# Altium PCB Temp-RH_Sensor_Unit_board.PcbDoc
Units mm, origin at the board's own origin, x right, y up, seen from the top; angles counter-clockwise.
Board outline 60 x 60 mm, 4 copper layers (Component Side Top, Ground Plane, Power Plane, Component Side Bottom), stack 0.844 mm thick; 73 components, 53 nets, 315 pads, 117 vias.
Unrouted connection lines stored in the file: 6.
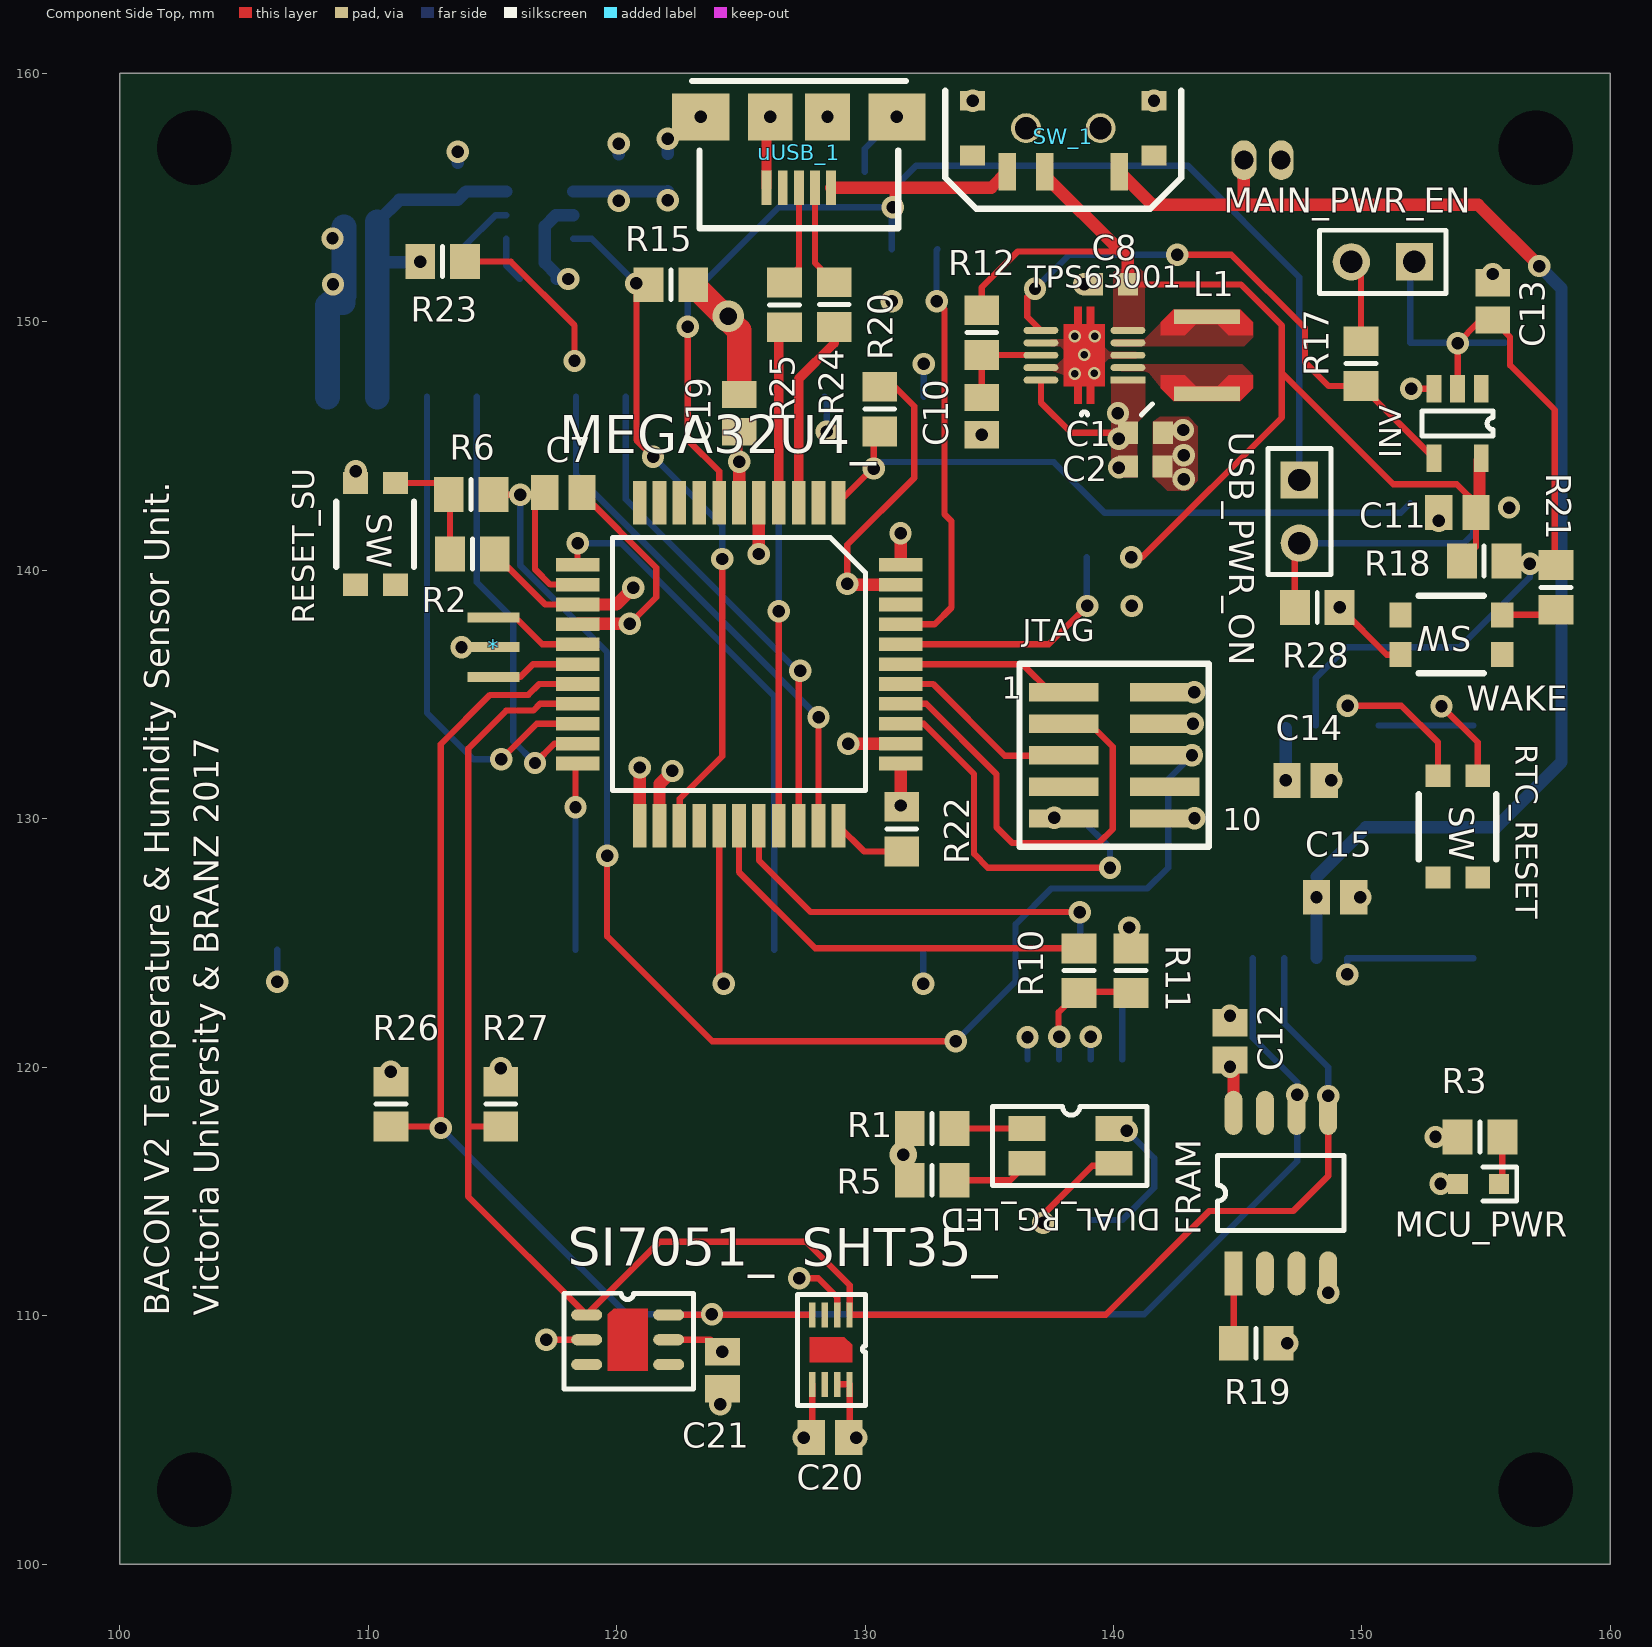
[diagram p0: Component Side Top view]
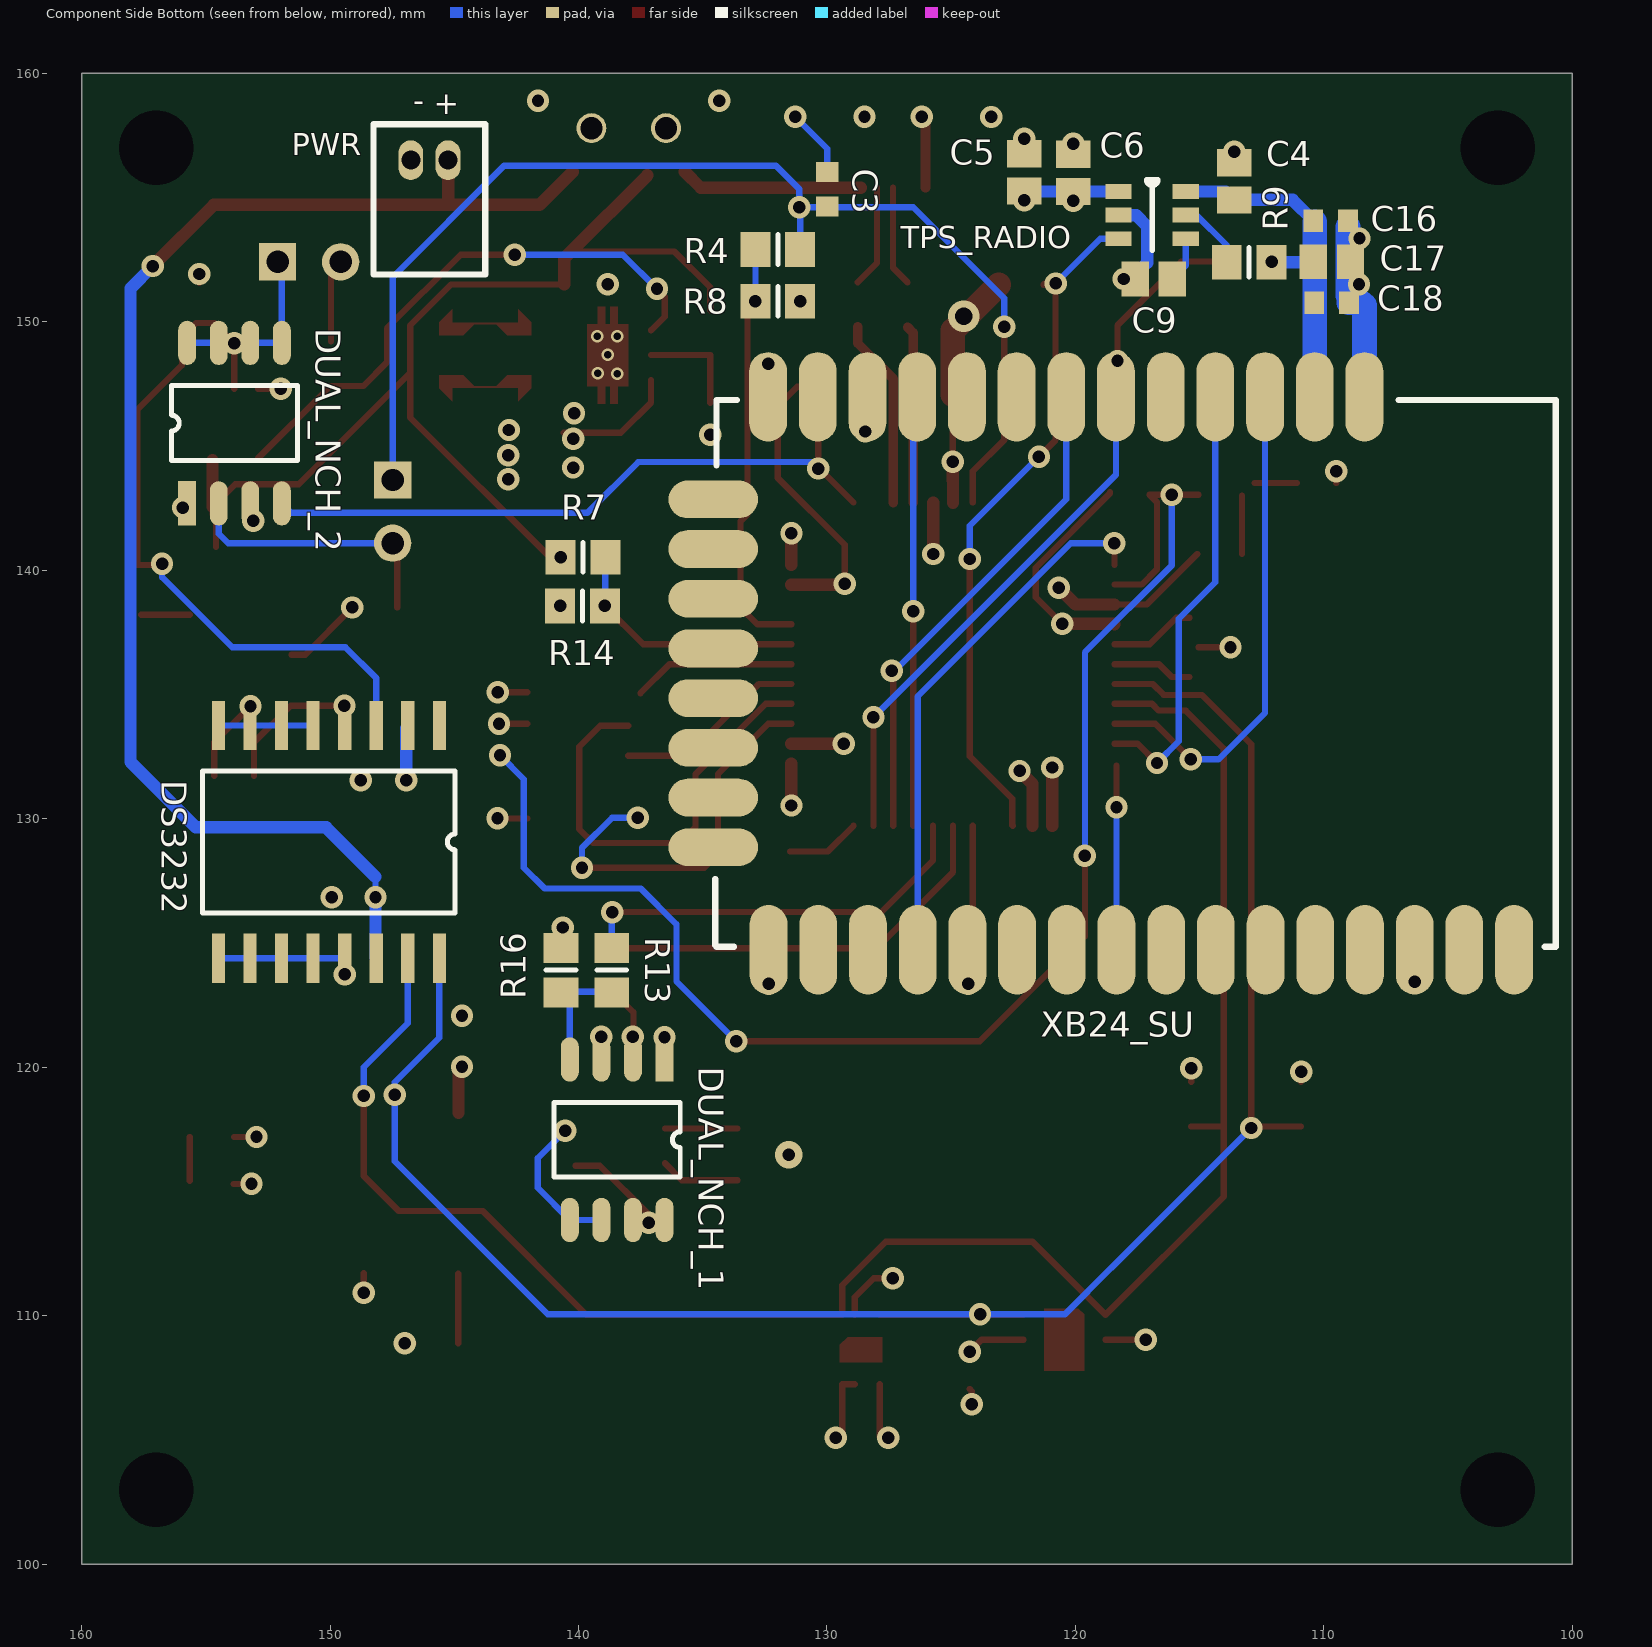
[diagram p1: Component Side Bottom view, seen from below]
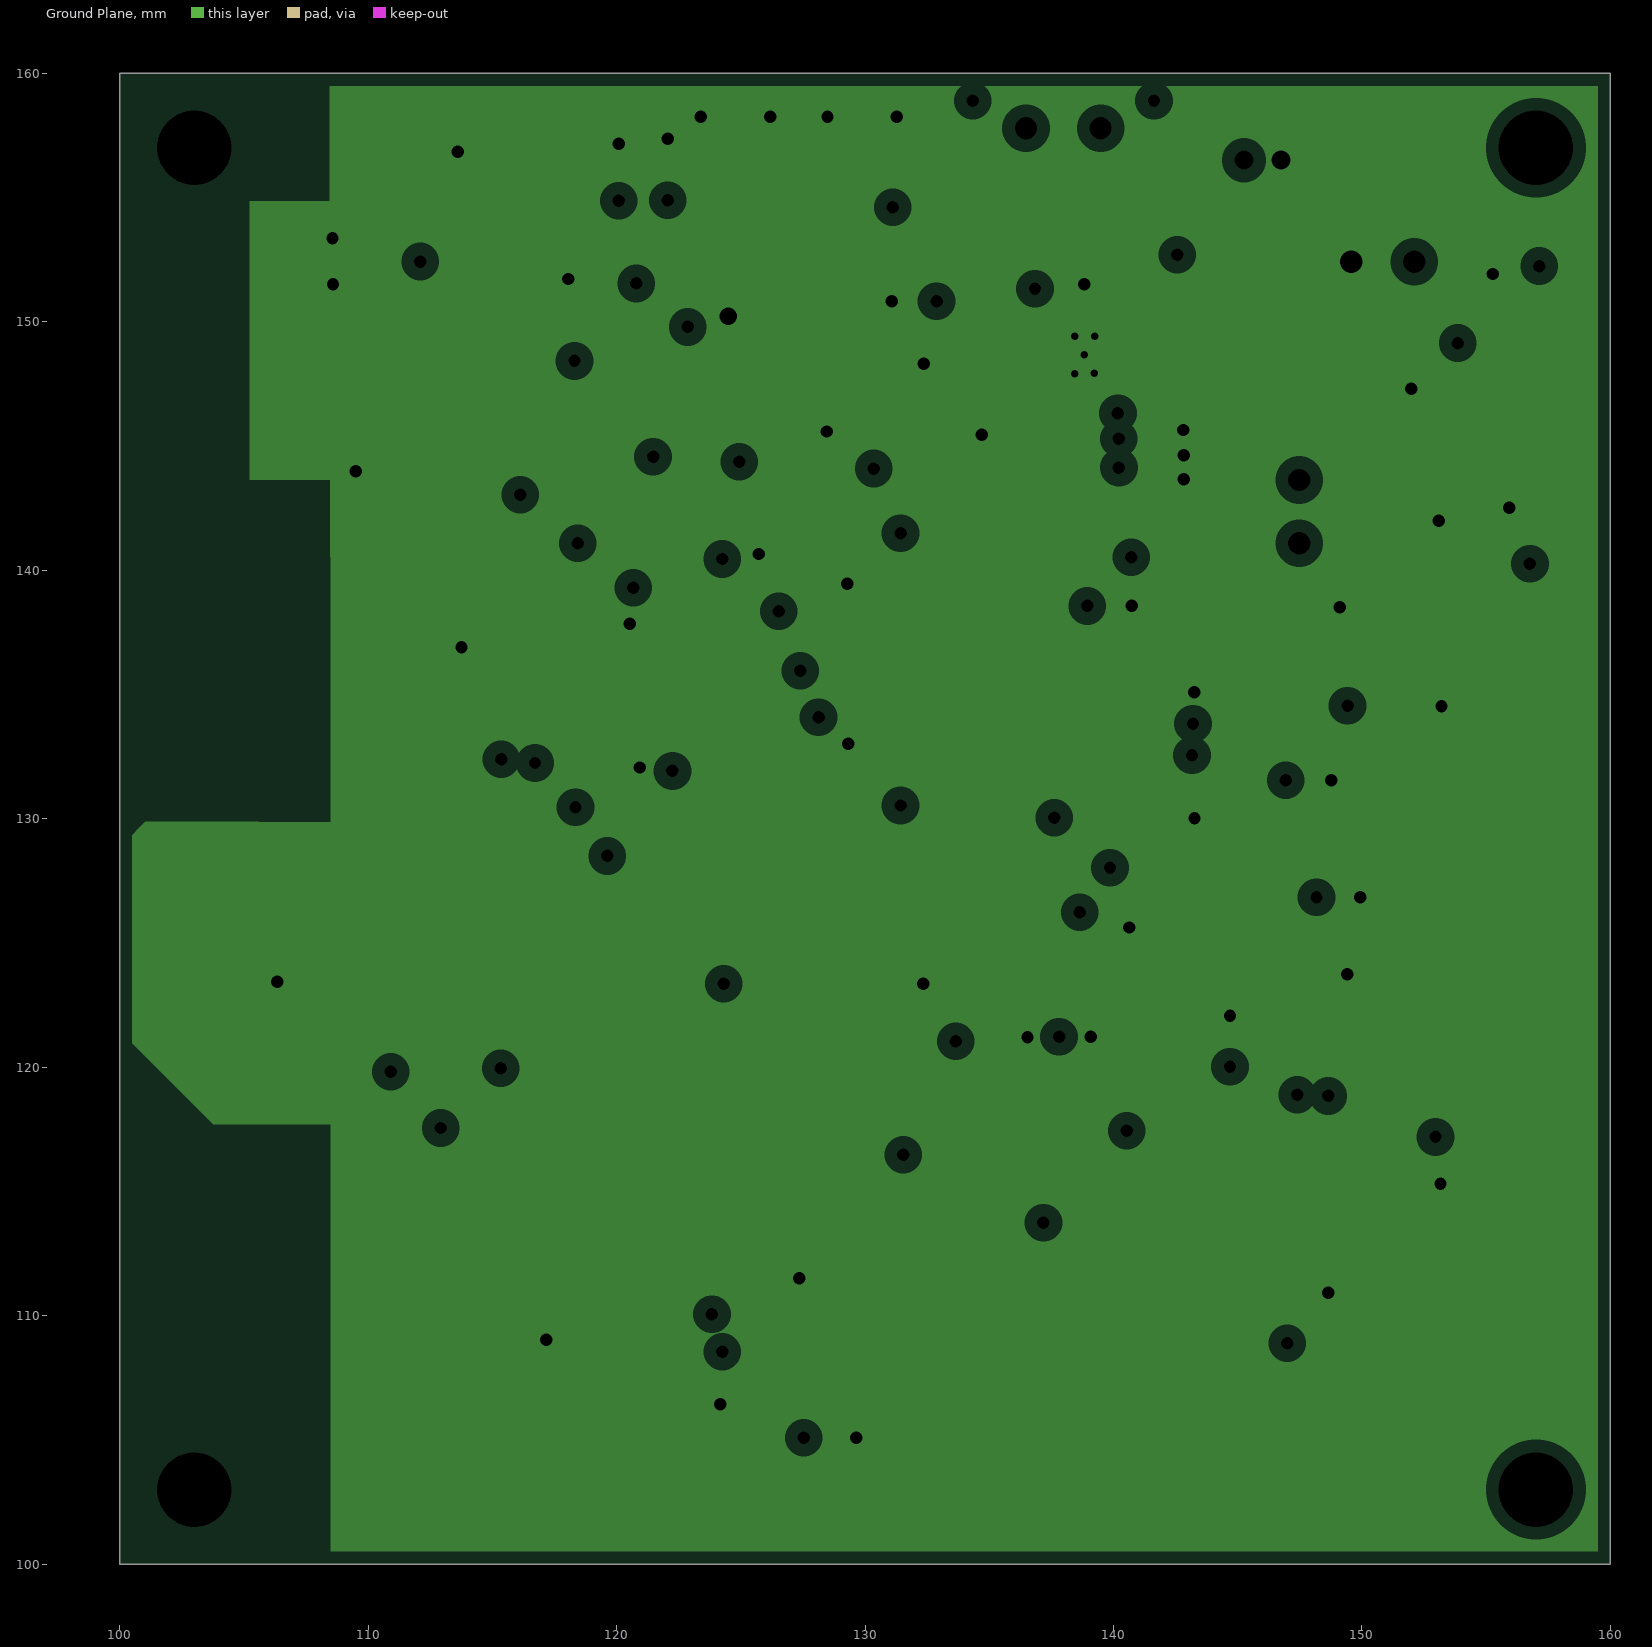
[diagram p2: Ground Plane, clearances drawn from the general rule]
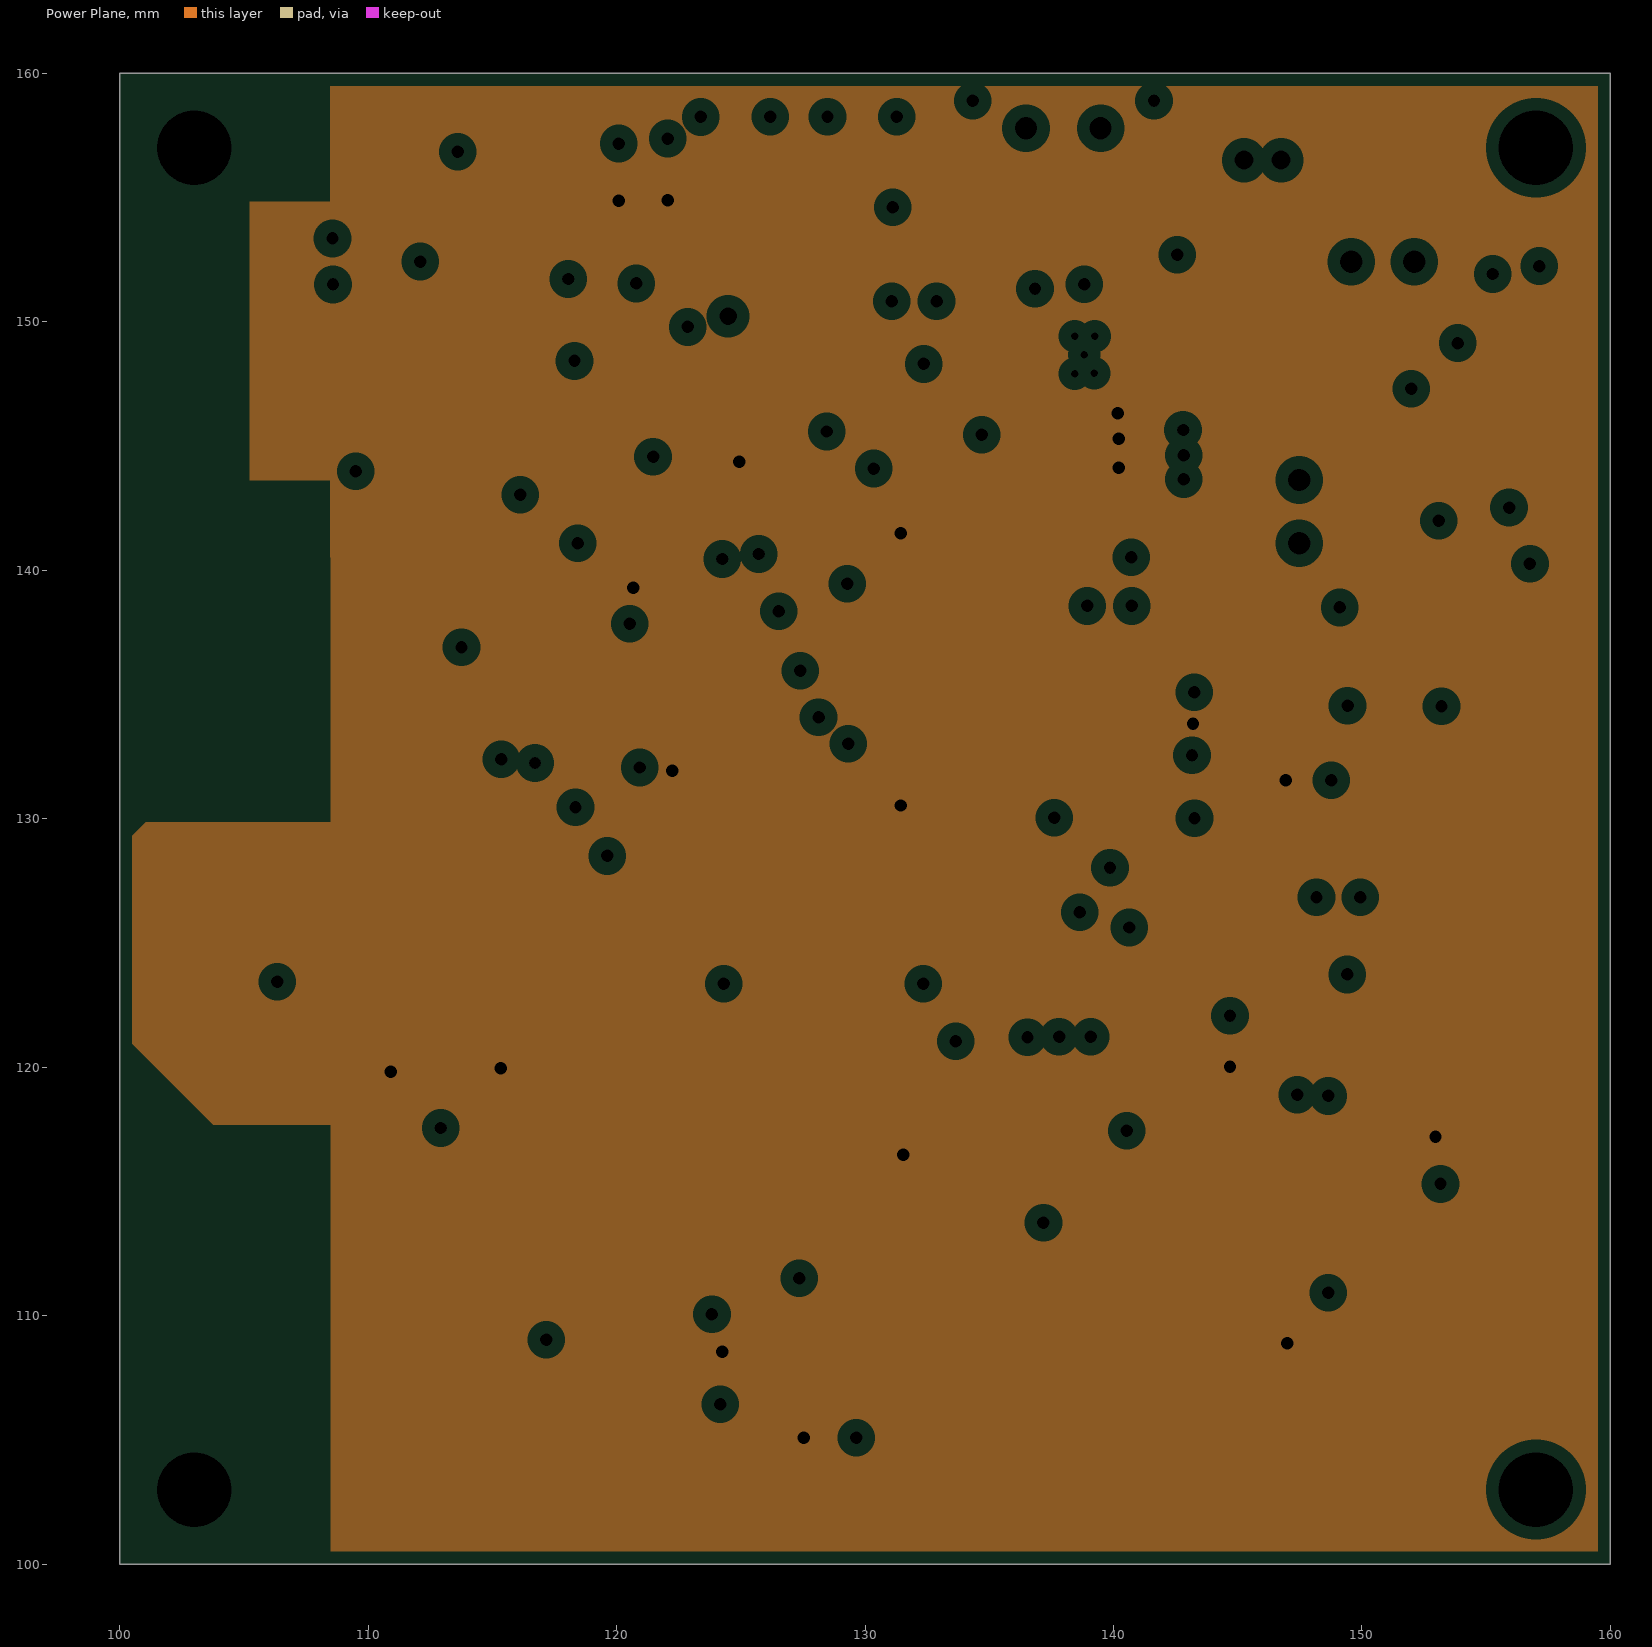
[diagram p3: Power Plane, clearances drawn from the general rule]

## Layer stack, top to bottom
Top Solder: solder mask 0.0102, Solder Resist, Dk 3.5
Component Side Top: signal copper 0.0356
Dielectric 1: core 0.32, FR-4, Dk 4.8
Ground Plane: plane copper 0.036, net GND
Dielectric 3: prepreg 0.127, Dk 4.2
Power Plane: plane copper 0.036, net +3V3_SU
Dielectric 4: core 0.254, Dk 4.2
Component Side Bottom: signal copper 0.0356
Bottom Solder: solder mask 0.0102, Solder Resist, Dk 3.5

## Board outline
100,100 160,100 160,160 100,160

## Design rules (kind name [scope] priority, off if disabled: settings)
Clearance [All] p1: gap=0.152
DiffPairsRouting [All] p1: maxlimit=0.254 minlimit=0.254 mostfreqgap=0.254 toplayer_minwidth=0.381 toplayer_maxwidth=0.381 toplayer_prefwidth=0.381 bottomlayer_minwidth=0.381 bottomlayer_maxwidth=0.381 bottomlayer_prefwidth=0.381 maxuncoupledlength=12.7
HoleSize [All] p1: absolutevalues=TRUE maxlimit=6.3 minlimit=0.3 maxpercent=80.000 minpercent=20.000
PlaneClearance [All] p1: clearance=0.508
PlaneConnect [All] p1: planeconnectstyle=Direct reliefexpansion=0.508 reliefentries=4 reliefconductorwidth=0.254 reliefairgap=0.254
PolygonConnect PolygonConnect_1 [All vs IsNamedPolygon('RegGND')] p1: connectstyle=Direct reliefconductorwidth=0.254 reliefentries=4 polygonreliefangle="90 Angle" airgapwidth=0.254
PolygonConnect [All] p2: connectstyle=Direct reliefconductorwidth=0.254 reliefentries=4 polygonreliefangle="90 Angle" airgapwidth=0.254
RoutingVias [All] p1: holewidth=0.5 width=0.9 viastyle="Through Hole" minholewidth=0.3 minwidth=0.7 maxholewidth=1 maxwidth=2
SolderMaskExpansion [All] p1: expansion=0.102
Width [All] p1: maxlimit=10 minlimit=0.152 preferedwidth=0.254
26 further rules are at their usual default settings.

## Classes and differential pairs
differential pair D_SU2: +D_SU2_P -D_SU2_N

## Components (designator, comment, footprint, x,y, rotation, side; value= is the part's Value field where it differs from the comment)
* "Resonator_8MHz" Resonator_8MHz 115.05,135.7 r90 top
C1 "Cap Semi" 1608[0603] 141.29,145.53 r0 top
C2 "Cap Semi" 1608[0603] 141.28,144.17 r0 top
C3 "Cap Semi" 1608[0603] 129.99,155.33 r270 bottom
C4 "Cap Semi" C0805 113.61,155.65 r90 bottom
C5 "Cap Semi" C0805 122.06,156.01 r90 bottom
C6 "Cap Semi" C0805 120.09,155.99 r90 bottom
C7 "Cap Semi" C0805 117.86,143.13 r180 top
C8 "Cap Semi" 1608[0603] 139.88,151.5 r0 top
C9 "Cap Semi" C0805 116.85,151.72 r0 bottom
C10 "Cap Semi" C0805 134.7,146.2 r90 top
C11 "Cap Semi" C0805 153.84,142.32 r0 top
C12 "Cap Semi" C0805 144.69,121.04 r270 top
C13 "Cap Semi" C0805 155.26,150.82 r90 top
C14 "Cap Semi" C0805 147.73,131.54 r180 top
C15 "Cap Semi" C0805 148.92,126.84 r180 top
C16 "Cap Semi" 1608[0603] 109.73,154.07 r180 bottom
C17 "Cap Semi" C0805 109.68,152.41 r180 bottom
C18 "Cap Semi" 1608[0603] 109.69,150.76 r180 bottom
C19 "Cap Semi" C0805 124.94,146.32 r270 top
C20 "Cap Semi" C0805 128.59,105.09 r180 top
C21 "Cap Semi" C0805 124.26,107.8 r90 top
DS3232 "DS3231" "16 SO" 145.6,133.75 r270 bottom
DUAL_NCH_1 "DUAL_MOSFET_IRF8915TRPBF" SOP-8 136.54,120.31 r270 bottom
DUAL_NCH_2 "DUAL_MOSFET_IRF8915TRPBF" SOP-8 155.75,142.69 r90 bottom
DUAL_RG_LED "LED_GREEN_RED_HSMF" LED4 136.52,117.53 r0 top (schematic designator DUAL_RG_LED1)
FRAM "FRAM 8-SOP" SOP-8 144.83,111.7 r90 top
INV "Inverter" SOT-23 154.8,147.3 r270 top (schematic designator INV_1)
JTAG "FTSH-105-01-XXX-DV-K" FTSH-105-01-XXX-DV-K 140.03,132.55 r270 top
L1 "Inductor" 2.2uH_Inductor 143.76,150.2 r270 top
MAIN_PWR_EN "Header 2" HDR1X2 152.11,152.41 r180 top
MCU_PWR "LED2" LED_Single_Orange 155.52,115.3 r180 top
MEGA32U4_ "ATMEGA32U4-AUR" Quad44 128.93,142.72 r270 top
PWR "ZH Conn" "ZH Series Header - 2 Position" 146,156.5 r0 bottom
R1 "Res3" 6-0805_N 132.7,117.53 r180 top
R2 "Res3" 6-0805_N 114.2,140.65 r0 top
R3 "Res3" 6-0805_N 154.75,117.19 r0 top
R4 "Res3" 6-0805_N 131.98,152.91 r180 bottom
R5 "Res3" 6-0805_N 132.7,115.45 r180 top
R6 "Res3" 6-0805_N 114.15,143.04 r180 top
R7 "Res3" 6-0805_N 139.82,140.52 r0 bottom
R8 "Res3" 6-0805_N 131.98,150.82 r0 bottom
R9 "Res3" 6-0805_N 113.01,152.39 r180 bottom
R10 "Res3" 6-0805_N 138.61,123.88 r90 top
R11 "Res3" 6-0805_N 140.71,123.88 r270 top
R12 "Res3" 6-0805_N 134.7,149.56 r90 top
R13 "Res3" 6-0805_N 138.66,123.9 r90 bottom
R14 "Res3" 6-0805_N 139.84,138.56 r180 bottom
R15 "Res3" 6-0805_N 122.19,151.49 r0 top
R16 "Res3" 6-0805_N 140.7,123.9 r270 bottom
R17 "Res3" 6-0805_N 149.96,148.31 r270 top
R18 "Res3" 6-0805_N 154.92,140.37 r0 top
R19 "Res3" 6-0805_N 145.74,108.89 r0 top
R20 "Res3" 6-0805_N 130.59,146.48 r270 top
R21 "Res3" 6-0805_N 157.81,139.31 r90 top
R22 "Res3" 6-0805_N 131.48,129.58 r270 top
R23 "Res3" 6-0805_N 113,152.42 r0 top
R24 "Res3" 6-0805_N 128.76,150.69 r270 top
R25 "Res3" 6-0805_N 126.76,150.68 r270 top
R26 "Res3" 6-0805_N 110.92,118.51 r270 top
R27 "Res3" 6-0805_N 115.34,118.51 r270 top
R28 "Res3" 6-0805_N 148.2,138.5 r180 top
RESET_SU "SW-PB" SW_TACTILE 111.1,143.51 r270 top
RTC_RESET "SW-PB" SW_TACTILE 154.66,131.73 r270 top (schematic designator RTC_RESET_1)
SHT35_ "SHT35" "SHT35 - small" 129.38,109.8 r270 top
SI7051_ "SI7051" "SI7051 - small" 118.9,110.03 r0 top
SW_1 "Slide_switch" Slide_SW 137.98,157.79 r180 top
TPS63001 "TPS63001DRCT" "SON10 - small" 140.63,147.65 r180 top (schematic designator TPS63001_)
TPS_RADIO "TPS22918-Q1" SOT-23-6 118.26,155.24 r180 bottom (schematic designator TPS22919_RADIO)
USB_PWR_ON "Header 2" HDR1X2 147.48,143.63 r270 top
uUSB_1 "micro_USB" MicroUSB_CONN 127.34,155.39 r180 top
WAKE "SW-PB" SW_TACTILE 155.65,136.6 r180 top
XB24_SU "XB24CDMUIS-001" XB24_RADIO 108.37,146.85 r270 bottom locked

## Footprints (in the part's own frame and the unit in brackets; to place one, negate y for a bottom-side part, rotate by r counter-clockwise, add the part's x,y. Pads: shape width x height; smd on the part's side, far side on the other; paste and mask are expansions set on the pad)
2.2uH_Inductor [mm] "LPS3314-222MRB"
  rect 0.6x2.65 smd: 1(0,0) 2(3.1,0)
  Component Side Top region: -0.3,1.325 0.225,1.85 0.75,1.85 0.75,0.882 0.3,0.44 0.3,-0.44 0.75,-0.882 0.75,-1.85 0.225,-1.85 -0.3,-1.325 0.25,-1.325 0.25,1.325
  Component Side Top region: 3.4,-1.325 2.875,-1.85 2.35,-1.85 2.35,-0.882 2.8,-0.44 2.8,0.44 2.35,0.882 2.35,1.85 2.875,1.85 3.4,1.325 2.85,1.325 2.85,-1.325
  body extent -0.3,-1.85 3.4,1.85, height 1.4
6-0805_N [mm] "Chip Resistor, Body 2.0x1.2mm, IPC Medium Density"
  rect 1.2x1.4 smd: 1(-0.9,0) 2(0.9,0)
  silkscreen extent 0,-0.6 0,0.6, body extent -1.07,-0.7 1.07,0.7, height 0.7
"16 SO" [mm]
  rect 1.98x0.53 smd: 1(0,0) 2(0,-1.27) 3(0,-2.54) 4(0,-3.81) 5(0,-5.08) 6(0,-6.35) 7(0,-7.62) 8(0,-8.89) 9(9.37,-8.89) 10(9.37,-7.62) 11(9.37,-6.35) 12(9.37,-5.08) 13(9.37,-3.81) 14(9.37,-2.54) 15(9.37,-1.27) 16(9.37,0)
  silkscreen extent 1.83,-9.53 7.54,0.63, body extent 1.83,-9.53 7.54,0.63, height 3
1608[0603] [mm] "Chip Capacitor, Body 1.6x0.8mm, IPC High Density"
  rect 0.8x0.9 smd: 1(-0.7,0) 2(0.7,0)
  body extent -0.87,-0.48 0.87,0.48, height 1.3
C0805 [mm] "Chip Capacitor, Body 2.0x1.3mm, IPC High Density"
  rect 1.1x1.4 smd: 1(-0.75,0) 2(0.75,0)
  body extent -1.1,-0.72 1.1,0.72, height 1.4
FTSH-105-01-XXX-DV-K [mil]
  rect 29x110 smd mask+2: 1(-100,-80) 2(-100,80) 3(-50,-80) 4(-50,80) 5(0,-80) 6(0,80) 7(50,-80) 8(50,80) 9(100,-80) 10(100,80)
  silkscreen extent -145,-150 145,150
HDR1X2 [mm] "Connector; Header; 2 Position"
  rect 1.5x1.5 hole 0.9: 1(0,0)
  round 1.5 hole 0.9: 2(2.54,0)
  silkscreen extent -1.27,-1.27 3.81,1.27
LED4 [mm]
  rect 1.5x1 smd: 1(0,0) 2(3.5,0) 3(0,-1.4) 4(3.5,-1.4)
  silkscreen extent -1.4,-2.29 4.83,0.89, body extent -0.03,-1.88 3.62,0.5, height 2
LED_Single_Orange [mm] "KP-1608SECK"
  rect 0.8x0.8 smd: 1(0,0) 2(1.65,0)
  silkscreen extent -0.71,-0.67 0.65,0.7, body extent -0.07,-0.5 1.77,0.46, height 2
MicroUSB_CONN [mm]
  rect 0.4x1.4 smd: 1(-1.3,0) 2(-0.65,0) 3(0,0) 4(0.65,0) 5(1.3,0)
  rect 2.3x1.9 smd: 5(-3.95,-2.85) 5(3.95,-2.85)
  rect 1.8x1.9 smd: 5(-1.15,-2.85) 5(1.15,-2.85)
  silkscreen extent -4.3,-4.3 4.3,1.63
Quad44 [mm]
  rect 1.75x0.55 smd: 1(0,0) 2(0,-0.8) 3(0,-1.6) 4(0,-2.4) 5(0,-3.2) 6(0,-4) 7(0,-4.8) 8(0,-5.6) 9(0,-6.4) 10(0,-7.2) 11(0,-8) 23(13,-8) 24(13,-7.2) 25(13,-6.4) 26(13,-5.6) 27(13,-4.8) 28(13,-4) 29(13,-3.2) 30(13,-2.4) 31(13,-1.6) 32(13,-0.8) 33(13,0)
  rect 0.55x1.75 smd: 12(2.5,-10.5) 13(3.3,-10.5) 14(4.1,-10.5) 15(4.9,-10.5) 16(5.7,-10.5) 17(6.5,-10.5) 18(7.3,-10.5) 19(8.1,-10.5) 20(8.9,-10.5) 21(9.7,-10.5) 22(10.5,-10.5) 34(10.5,2.5) 35(9.7,2.5) 36(8.9,2.5) 37(8.1,2.5) 38(7.3,2.5) 39(6.5,2.5) 40(5.7,2.5) 41(4.9,2.5) 42(4.1,2.5) 43(3.3,2.5) 44(2.5,2.5)
  silkscreen extent 1.41,-9.09 11.59,1.09, body extent 1.27,-9.27 11.68,1.27, height 1.2
Resonator_8MHz [mm] "CSTCE8M00G55Z-R0"
  rect 0.4x2.1 smd: 1(0,0) 2(1.2,0) 3(2.4,0)
  body extent -0.33,-0.95 2.84,0.94, height 1.2
"SHT35 - small" [mm]
  rect 1x0.25 smd mask+0.15: 1(-0.225,0) 2(-0.225,-0.5) 3(-0.225,-1) 4(-0.225,-1.5) 5(2.575,-1.5) 6(2.575,-1) 7(2.575,-0.5) 8(2.575,0)
  Component Side Top region: 0.67,-1.6 1.67,-1.6 1.67,0.1 0.98,0.1 0.67,-0.21
  silkscreen extent -1.06,-2.09 3.42,0.64, body extent -0.43,-1.87 2.62,0.4, height 1
"SI7051 - small" [mm]
  oval 1.25x0.45 smd: 1(-0.1,0) 2(-0.1,-1) 3(-0.1,-2) 4(3.2,-2) 5(3.2,-1) 6(3.2,0)
  Component Side Top region: 0.98,0.25 2.35,0.25 2.35,-2.25 0.75,-2.25 0.75,0.02
  silkscreen extent -1.02,-2.98 4.2,0.87, body extent -0.33,-2.7 3.44,0.67, height 1
Slide_SW [mm] "PCM12SMTR"
  rect 0.7x1.5 smd: 1(-2.25,1.75) 2(0.75,1.75) 3(2.25,1.75)
  rect 1x0.8 smd: 4(-3.65,-1.1) 4(-3.65,1.1) 4(3.65,-1.1) 4(3.65,1.1)
  round 1.2 hole 0.9: 5(-1.5,0) 5(1.5,0)
  silkscreen extent -4.75,-1.5 4.75,3.25, body extent -3.14,-1.65 3.11,1.58, height 3
"SON10 - small" [mm]
  rect 1.4x0.28 smd: 1(0.05,0)
  oval 1.4x0.28 smd: 2(0.05,-0.5) 3(0.05,-1) 4(0.05,-1.5) 5(0.05,-2) 6(3.55,-2) 7(3.55,-1.5) 8(3.55,-1) 9(3.55,-0.5) 10(3.55,0)
  Component Side Top region: 1.4,0.25 1.4,0.95 1.7,0.95 1.7,0.25 1.9,0.25 1.9,0.95 2.2,0.95 2.2,0.25 2.625,0.25 2.625,-2.25 2.2,-2.25 2.2,-2.95 1.9,-2.95 1.9,-2.25 1.7,-2.25 1.7,-2.95 1.4,-2.95 1.4,-2.25 0.975,-2.25 0.975,0.25
  silkscreen extent -0.94,0.96 1.92,1.4, body extent 0.01,-2.95 3.65,0.96, height 2
SOP-8 [mm]
  rect 1.78x0.72 smd: 1(0,0)
  oval 1.78x0.72 smd: 2(0,-1.27) 3(0,-2.54) 4(0,-3.81) 5(6.46,-3.81) 6(6.46,-2.54) 7(6.46,-1.27) 8(6.46,0)
  silkscreen extent 1.72,-4.45 4.74,0.63, body extent 1.72,-4.45 4.74,0.63, height 2
SOT-23 [mm]
  rect 1.1x0.6 smd: 1(0,0) 2(0,-0.95) 3(0,-1.9) 4(2.8,-1.9) 5(2.8,0)
  silkscreen extent 0.89,-2.38 1.91,0.48, body extent 0.72,-2.19 2.08,0.24, height 2
SOT-23-6 [mm]
  rect 1.05x0.6 smd: 1(0,0) 2(0,-0.95) 3(0,-1.9) 4(2.7,-1.9) 5(2.7,-0.95) 6(2.7,0)
  silkscreen extent 1.11,-2.38 1.59,0.48, body extent 0.65,-2.19 2.01,0.24, height 2
SW_TACTILE [mm] "KMR231G LFS"
  rect 0.9x1 smd: 1(0,0) 1(4.1,0) 2(0,-1.6) 2(4.1,-1.6)
  silkscreen extent 0.75,-2.37 3.37,0.75, body extent 0.27,-2.13 3.77,0.55, height 2
XB24_RADIO [mm] "XB24CDMUIS-001"
  oval 3.6x1.52 smd: 1(-0.125,0) 2(-0.125,-2) 3(-0.125,-4) 4(-0.125,-6) 5(-0.125,-8) 6(-0.125,-10) 7(-0.125,-12) 8(-0.125,-14) 9(-0.125,-16) 10(-0.125,-18) 11(-0.125,-20) 12(-0.125,-22) 13(-0.125,-24) 22(22.125,-23.98) 23(22.125,-21.98) 24(22.125,-19.98) 25(22.125,-17.98) 26(22.125,-15.98) 27(22.125,-13.98) 28(22.125,-11.98) 29(22.125,-9.98) 30(22.125,-7.98) 31(22.125,-5.98) 32(22.125,-3.98) 33(22.125,-1.98) 34(22.125,0.02) 35(22.125,2.02) 36(22.125,4.02) 37(22.125,6.02)
  oval 1.52x3.6 smd: 14(4,-26.21) 15(6,-26.21) 16(8,-26.21) 17(10,-26.21) 18(12,-26.21) 19(14,-26.21) 20(16,-26.21) 21(18,-26.21)
  silkscreen extent 0,-26.12 22,7.7, body extent 0,-26.07 22,7.7, height 4
"ZH Series Header - 2 Position" [mm]
  oval 1x1.6 hole 0.762: 1(-0.75,0) 2(0.75,0)
  silkscreen extent -2.25,-1.45 2.25,4.6

## Part data
C1 C2 C3 C4 C5 C6 C7 C8 C9 C10 C11 C12 C13 C14 C15 C16 C17 C18 C19 C20 C21: "Capacitor (Semiconductor SIM Model)"
INV: library part SN74LVC1GU04
JTAG: "TERMINAL STRIP, .050\"(1.27mm) PITCH, 10 PINS, KEYED"
MAIN_PWR_EN USB_PWR_ON: "Header, 2-Pin"
MCU_PWR: "Typical RED, GREEN, YELLOW, AMBER GaAs LED"
PWR: library part "Header 2", "Header, 2-Pin"
R1 R2 R3 R4 R5 R6 R7 R8 R9 R10 R11 R12 R13 R14 R15 R16 R17 R18 R19 R20 R21 R22 R23 R24 R25 R26 R27 R28: "Resistor"
RESET_SU RTC_RESET WAKE: "Switch"

## Free pads (board coordinates)
  round 0 hole 3: 0(103,103) 0(103,157) 0(157,103) 0(157,157)

## Via types
v1: diameter 0.9, hole 0.5, Component Side Top to Component Side Bottom, 74 vias
v2: diameter 0.9, hole 0.5, Component Side Top to Component Side Bottom, tented bottom, 19 vias
v3: diameter 0.9, hole 0.5, Component Side Top to Component Side Bottom, tented both sides, 16 vias
v4: diameter 0.5, hole 0.3, Component Side Top to Component Side Bottom, 5 vias
v5: diameter 1.27, hole 0.711, Component Side Top to Component Side Bottom, 1 vias
v6: diameter 1.1, hole 0.5, Component Side Top to Component Side Bottom, 1 vias
v7: diameter 0.9, hole 0.5, Component Side Top to Component Side Bottom, tented top, 1 vias

## Nets (pads, with @x,y where several pads share a name; then routed paths per layer and width w, separated by ;. In a path a pad name is that pad's centre, name@x,y a point inside that pad or via, vN(x,y) a via of type N, cw(c..) or ccw(c..) an arc to the next point about the centre after c; other vN are vias at no path point)
+3V3: C1.1 C2.1 C5.1 C6.1 C12.2 C14.2 C19.2 C20.2 C21.2 DS3232.2 FRAM.8 JTAG.4 MEGA32U4_.6 MEGA32U4_.14 MEGA32U4_.24 MEGA32U4_.34 MEGA32U4_.44 R1.2 R2.2 R3.1 R5.2 R19.2 R22.1 R26.1 R27.1 SHT35_.5 SI7051_.5 TPS63001.1 TPS63001.10 TPS_RADIO.1 | length 37
  Component Side Top w0.254: R26.1 v1(110.92,119.82) ; R2.2 117.13,138.62 MEGA32U4_.14 ; R27.1 v1(115.34,119.96) ; SI7051_.5@122.09,109.03 123.78,109.03 v1(124.26,108.55) ; v2(124.94,144.365) C19.2 ; v1(127.53,105.09) C20.2 ; C20.2@127.88,105.13 SHT35_.5@127.88,107.235 ; v6(131.54,116.47) v6@131.8,116.47 ; TPS63001.10 137.08,146.75 138.3,145.53 C1.1 ; JTAG.4 v1(143.2,133.82) ; v1(144.69,120.01) C12.2 ; R19.2 v1(146.99,108.89) ; v1(152.96,117.19) R3.1
  Component Side Top w0.5: MEGA32U4_.14 120,138.62 v3(120.67,139.29) ; MEGA32U4_.24 121.73,131.4 v3(122.25,131.92) ; MEGA32U4_.6 v2@124.935,144.365 ; v2(131.43,130.53) MEGA32U4_.34 ; MEGA32U4_.44 v2(131.43,141.48) ; FRAM.8 C12.2@144.83,120.01
  Component Side Bottom w0.5: TPS_RADIO.1 C6.1 ; v1(120.09,154.87) C6.1 ; C5.1@122.04,155.24 C6.1 ; v1(122.06,154.89) C5.1 ; v2(146.93,131.54) DS3232.2@146.93,133.64
  other v1: 140.22,144.13
  other v3: 140.21,145.29 140.18,146.31
+3V3_RADIO_SU: C4.1 C16.1 C17.1 C18.1 R9.2 R23.1 TPS_RADIO.6 XB24_SU.2 | length 14.4
  Component Side Bottom w0.5: C16.1@110.37,154.01 C16.1 111.26,154.9 C4.1 113.95,155.24 TPS_RADIO.6 ; C17.1@110.45,152.39 R9.2
  Component Side Bottom w1: XB24_SU.2 C16.1@110.37,154.01
  other v1: 112.1,152.42
CTS_SU: MEGA32U4_.12 XB24_SU.25 | length 21.5
  Component Side Top w0.254: MEGA32U4_.12 118.43,141.07 v3(118.44,141.08)
  Component Side Bottom w0.254: v3(118.44,141.08) 120.19,141.08 126.35,134.92 XB24_SU.25
D_SU2_N: MEGA32U4_.3 R24.2 | length 7.7
  Component Side Top w0.381: MEGA32U4_.3 127.33,147.7 128.76,149.13 R24.2
D_SU2_P: MEGA32U4_.4 R25.2 | length 7.2
  Component Side Top w0.381: MEGA32U4_.4 126.53,149.55 R25.2
D_SU_N: R24.1 uUSB_1.2 | length 4.1
  Component Side Top w0.254: uUSB_1.2 127.99,152.36 R24.1
D_SU_P: R25.1 uUSB_1.3 | length 4.1
  Component Side Top w0.254: R25.1 127.34,152.16 uUSB_1.3
DTR_SU: MEGA32U4_.30 XB24_SU.10 | length 17.1
  Component Side Top w0.254: MEGA32U4_.30 v3(126.53,138.35)
  Component Side Bottom w0.254: v3(126.53,138.35) XB24_SU.10@126.53,146.815
GLED_EN_SU: MEGA32U4_.29 R13.2 | length 16.6
  Component Side Top w0.254: MEGA32U4_.29 125.73,128.33 127.82,126.24 v1(138.64,126.24)
  Component Side Bottom w0.254: R13.2 v1@138.66,126.22
GND: *.2 C1.2 C2.2 C3.1 C4.2 C5.2 C6.2 C7.1 C8.1 C9.2 C10.1 C11.1 C12.1 C13.2 C14.1 C15.1 C16.2 C17.2 C18.2 C19.1 C20.1 C21.1 DS3232.5 DS3232.6 DS3232.7 DS3232.8 DS3232.9 DS3232.10 DS3232.11 DS3232.12 DS3232.13 DUAL_NCH_1.1 DUAL_NCH_1.3 DUAL_NCH_2.1 DUAL_NCH_2.3 FRAM.4 INV.3 JTAG.2 JTAG.10 MAIN_PWR_EN.2 MCU_PWR.2 MEGA32U4_.5 MEGA32U4_.15 MEGA32U4_.23 MEGA32U4_.35 MEGA32U4_.43 PWR.2 R8.1 R11.1 R14.1 R15.2 R16.1 R17.1 R20.1 R28.1 RESET_SU.2 RTC_RESET.1 SHT35_.2 SHT35_.7 SHT35_.8 SI7051_.2 TPS63001.3 TPS63001.7 TPS63001.9 TPS_RADIO.2 uUSB_1.5 WAKE.1 XB24_SU.1 XB24_SU.11 XB24_SU.13 XB24_SU.22 XB24_SU.35 | length 94.6
  Component Side Top w0.254: RESET_SU.2@109.5,143.51 v2(109.5,143.98) ; v2(113.76,136.9) *.2 ; v1(117.17,109.03) SI7051_.2@118.79,109.03 ; C7.1 118.61,143.09 121.6,140.1 121.6,138.91 v3(120.53,137.84) ; v1(124.17,106.43) 124.17,106.96 C21.1 ; v1(127.35,111.5) 128.12,111.5 128.88,110.74 SHT35_.2@128.88,110.035 ; SHT35_.7@128.88,107.235 129.38,107.235 C20.1@129.38,105.13 ; v3(129.29,139.46) 129.29,141.02 131.98,143.71 131.98,146.6 131.2,147.38 R20.1 ; C20.1 v1(129.65,105.09) ; v1(140.64,125.62) 140.65,125.62 v1@140.71,125.68 ; JTAG.10 v1(143.26,130.01) ; JTAG.2 v1(143.25,135.09) ; C12.1 v1(144.69,122.07) ; C14.1 v2(148.76,131.54) ; v1(148.64,110.92) FRAM.4 ; v1(149.1,138.5) 151,136.6 WAKE.1@151.55,136.6 ; C15.1 v2(149.93,126.84) ; R17.1 MAIN_PWR_EN.2@149.96,152.02 ; v1(151.98,147.3) INV.3 ; v1(153.09,141.99) 153.11,141.99 C11.1@153.23,142.11 ; v1(153.16,115.3) MCU_PWR.2 ; v1(153.2,134.53) 154.66,133.07 RTC_RESET.1@154.66,131.73 ; C13.2 v1(155.26,151.92)
  Component Side Top w0.4: uUSB_1.5@126.04,155.39 uUSB_1.5@126.04,158.11
  Component Side Top w0.5: MEGA32U4_.15 118.45,137.84 v3(120.53,137.84) ; MEGA32U4_.23 v3(120.93,132.06) ; v3(125.72,140.65) 125.72,142.71 MEGA32U4_.5 ; v1(126.18,158.25) uUSB_1.5@126.19,158.24 ; uUSB_1.5@128.49,158.24 v1(128.49,158.25) ; v3(129.29,139.46) 129.33,139.42 MEGA32U4_.43 ; v3(129.33,133.02) MEGA32U4_.35 ; v1(131.28,158.25) uUSB_1.5@131.29,158.24
  Component Side Top w1: R15.2 124.94,149.64 C19.1
  Component Side Bottom w0.254: v1(106.35,123.43) XB24_SU.35 ; C9.2 C9.2@117.6,151.885 ; XB24_SU.11 128.46,146.885 v1(128.46,145.58) ; C3.1 129.99,156.96 v1(131.28,158.25) ; v1(132.35,123.36) XB24_SU.22 ; XB24_SU.13 v7(132.37,148.3) ; DUAL_NCH_1.1 v1(136.54,121.2) ; DUAL_NCH_1.3 v1(139.08,121.22) ; v1(149.41,123.73) DS3232.13 DS3232.12 DS3232.11 DS3232.10 DS3232.9 ; DS3232.5 DS3232.6 DS3232.7 DS3232.8 ; DUAL_NCH_2.1 v1(155.92,142.52)
  Component Side Bottom w0.5: v1(108.57,153.35) C16.2@109.03,153.81 ; v1(108.59,151.5) C18.2@109.03,151.06 ; C4.2 v1(113.61,156.84) ; C9.2 v1(118.06,151.72) ; C9.2@117.6,151.885 117.11,152.375 117.11,153.84 117.56,154.29 TPS_RADIO.2 ; C6.2 v1(120.09,157.17) ; C5.2 v1(122.06,157.37)
  Component Side Bottom w1: XB24_SU.1 108.37,150.65 108.48,150.76 C18.2 ; C18.2@109.03,151.06 C16.2@109.03,153.81
  other v1: 140.74,138.56 131.08,150.82 138.83,151.51 123.39,158.24
  other v2: 142.83,143.66 142.83,144.63 134.7,145.45 142.8,145.64
  other v4: 138.44,147.91 139.23,147.92 138.82,148.67 138.44,149.42 139.25,149.42
  other v5: 124.49,150.22
MAIN_PWR_EN: INV.4 R17.2 TPS63001.6 | length 22.9
  Component Side Top w0.254: v1(136.84,151.32) 136.53,151.01 136.53,150.2 TPS63001.6 ; v1(142.57,152.7) 144.74,152.7 147.71,149.73 147.71,148.36 148.66,147.41 R17.2 149.99,147.41 INV.4
  Component Side Bottom w0.254: v1(136.84,151.32) 138.22,152.7 v1(142.57,152.7)
MCU_PWR_EN: DUAL_NCH_2.4 MEGA32U4_.1 R20.2 | length 26
  Component Side Top w0.254: MEGA32U4_.1 v2@130.35,144.14 ; v2(130.35,144.09) v2@130.35,144.14 ; R20.2@130.35,145.34 v2@130.35,144.14
  Component Side Bottom w0.254: v2(130.35,144.09) 130.61,144.35 137.6,144.35 139.64,142.31 151.56,142.31 DUAL_NCH_2.4
Net*_1: *.1 MEGA32U4_.17 | length 3.2
  Component Side Top w0.254: *.1@115.41,135.7 116.12,135.7 116.64,136.22 MEGA32U4_.17
Net*_3: *.3 MEGA32U4_.16 | length 3.5
  Component Side Top w0.254: *.3@115.41,138.08 115.95,138.08 117.01,137.02 MEGA32U4_.16
NetC9_1: C9.1 TPS_RADIO.4 | length 1.8
  Component Side Bottom w0.254: TPS_RADIO.4 115.56,152.26 C9.1
NetC10_2: C10.2 R12.1 TPS63001.8 | length 4.3
  Component Side Top w0.254: C10.2@134.7,146.74 R12.1 TPS63001.8@137.07,148.66
NetDS3232_4: DS3232.4 RTC_RESET.2 | length 5.6
  Component Side Top w0.254: v1(149.42,134.55) 151.58,134.55 153.06,133.07 RTC_RESET.2@153.06,131.73
NetDUAL_NCH_1_2: DUAL_NCH_1.2 R10.1 R11.2 | length 5.2
  Component Side Top w0.254: v1(137.81,121.22) 137.79,121.24 137.79,122.21 138.61,123.03 R11.2@140.71,123.03
  Component Side Bottom w0.254: DUAL_NCH_1.2 v1(137.81,121.22)
NetDUAL_NCH_1_4: DUAL_NCH_1.4 R13.1 R16.2 | length 4.9
  Component Side Bottom w0.254: R13.1@138.66,123.03 R16.2@140.87,123.03 ; DUAL_NCH_1.4 R16.2@140.35,123.03
NetDUAL_NCH_1_5: DUAL_NCH_1.5 DUAL_NCH_1.6 DUAL_RG_LED.2 | length 5.8
  Component Side Bottom w0.254: DUAL_NCH_1.6 DUAL_NCH_1.5 141.64,115.14 141.64,116.34 v1(140.54,117.44)
NetDUAL_NCH_1_7: DUAL_NCH_1.7 DUAL_NCH_1.8 DUAL_RG_LED.4 | length 4.4
  Component Side Top w0.254: v1(137.18,113.74) 137.18,114.07 139.14,116.03 DUAL_RG_LED.4@140.12,116.03
  Component Side Bottom w0.254: v1@137.12,113.85 137.29,113.85 v1(137.18,113.74)
NetDUAL_NCH_2_2: DUAL_NCH_2.2 R28.2 USB_PWR_ON.2 | length 10.8
  Component Side Top w0.254: R28.2 USB_PWR_ON.2@147.3,140.91
  Component Side Bottom w0.254: USB_PWR_ON.2 154.1,141.09 154.48,141.47 DUAL_NCH_2.2
NetDUAL_RG_LED1_1: DUAL_RG_LED.1 R1.1 | length 2.9
  Component Side Top w0.254: R1.1 DUAL_RG_LED.1
NetDUAL_RG_LED1_3: DUAL_RG_LED.3 R5.1 | length 3.2
  Component Side Top w0.254: R5.1 135.84,115.45 DUAL_RG_LED.3
NetFRAM_1: FRAM.1 R19.1 | length 2.8
  Component Side Top w0.254: R19.1 FRAM.1@144.84,111.69
NetL1_1: L1.1 TPS63001.4
NetL1_2: L1.2 TPS63001.2
NetMCU_PWR_1: MCU_PWR.1 R3.2 | length 1.8
  Component Side Top w0.254: MCU_PWR.1@155.65,115.43 R3.2
NetMEGA32U4__33: MEGA32U4_.33 R22.2 | length 3
  Component Side Top w0.254: MEGA32U4_.33 129.97,128.68 R22.2
NetR2_1: R2.1 R6.2 RESET_SU.1 | length 4
  Component Side Top w0.254: RESET_SU.1@111.1,143.51 R6.2@112.78,143.51 ; R2.1 R6.2@113.3,142.99
NetR9_1: R9.1 TPS_RADIO.5 | length 2.8
  Component Side Bottom w0.254: R9.1 113.91,153.07 115.13,154.29 TPS_RADIO.5
NetR21_1: R21.1 WAKE.2 | length 1.9
  Component Side Top w0.254: WAKE.2@155.65,138.2 R21.1@157.6,138.2
R\E\S\E\T\_SU: C7.2 JTAG.6 MEGA32U4_.13 R6.1 | length 59.8
  Component Side Top w0.254: R6.1 v2(116.12,143.04) 117.02,143.04 116.72,142.74 116.72,140.04 117.34,139.42 MEGA32U4_.13 ; v2(119.62,128.5) 119.62,125.27 123.85,121.04 v1(133.65,121.04)
  Component Side Bottom w0.254: v2(116.12,143.04) 116.12,140.19 119.62,136.69 v2(119.62,128.5) ; v1(133.65,121.04) 136.06,123.45 136.06,125.75 137.5,127.19 141.36,127.19 142.2,128.03 142.2,131.59 v1(143.16,132.55)
RADIO_EN_SU: MEGA32U4_.25 R15.1 TPS_RADIO.3 | length 27.8
  Component Side Top w0.254: R15.1 121.24,151.54 v1(120.8,151.54) 120.8,145.24 v3(121.47,144.57) ; MEGA32U4_.25 122.54,129.73 122.54,130.8 124.25,132.51 v3(124.25,140.45)
  Component Side Bottom w0.254: TPS_RADIO.3 119,153.34 v1(120.8,151.54) ; v3(121.47,144.57) 124.25,141.79 v3(124.25,140.45)
RADIO_R\E\S\E\T\_SU: MEGA32U4_.32 R23.2 XB24_SU.6 | length 28.2
  Component Side Top w0.254: R23.2 115.74,152.42 118.31,149.85 v1(118.31,148.42) ; MEGA32U4_.32 v3(128.13,134.08)
  Component Side Bottom w0.254: XB24_SU.6 118.37,143.84 v3(128.13,134.08)
RLED_EN_SU: MEGA32U4_.28 R10.2 | length 16.8
  Component Side Top w0.254: MEGA32U4_.28 124.93,127.85 128,124.78 R10.2
RTS_SU: MEGA32U4_.22 XB24_SU.29 | length 7.4
  Component Side Top w0.254: v1(118.35,130.46) MEGA32U4_.22@118.35,132.14
  Component Side Bottom w0.254: XB24_SU.29 v1(118.35,130.46)
RX_STRENGTH_SU: MEGA32U4_.31 XB24_SU.7 | length 20.3
  Component Side Top w0.254: MEGA32U4_.31 127.33,135.89 v3(127.39,135.95)
  Component Side Bottom w0.254: XB24_SU.7 120.37,142.85 127.33,135.89 v3(127.39,135.95)
RXD_SU: MEGA32U4_.20 XB24_SU.3 | length 20.1
  Component Side Top w0.254: v2(115.36,132.39) 116.79,133.82 MEGA32U4_.20
  Component Side Bottom w0.254: XB24_SU.3 112.37,134.26 114.24,132.39 v2(115.36,132.39)
SCL_SENS_BRD: DS3232.16 FRAM.6 MEGA32U4_.18 R26.2 SHT35_.4 SI7051_.6 | length 78.7
  Component Side Top w0.254: R26.2 v1@112.86,117.61 ; v1(112.92,117.55) 112.92,132.99 114.91,134.98 116.45,134.98 116.89,135.42 MEGA32U4_.18 ; SI7051_.6@122.09,110.03 SHT35_.4@127.875,110.03
  Component Side Bottom w0.254: v1(112.92,117.55) 118.555,111.915 118.56,111.92 120.42,110.06 v1(123.84,110.06) 141.24,110.06 147.39,116.21 v1(147.39,118.89) 147.39,119.39 145.6,121.18 DS3232.16
SDA_SENS_BRD: DS3232.15 FRAM.5 MEGA32U4_.19 R27.2 SHT35_.1 SI7051_.1 | length 76
  Component Side Top w0.254: 114.05,117.61 R27.2 ; MEGA32U4_.19 116.92,134.62 116.65,134.35 115.56,134.35 114.03,132.82 114.03,114.79 118.79,110.03 121.73,112.97 127.63,112.97 129.38,111.22 129.38,110.035 139.685,110.035 143.86,114.21 147.23,114.21 148.64,115.62 FRAM.5 v1(148.64,118.84)
  Component Side Bottom w0.254: DS3232.15 146.87,121.76 148.64,119.99 v1(148.64,118.84)
SLEEP_STATUS_SU: MEGA32U4_.27 XB24_SU.26 | length 6.4
  Component Side Top w0.254: MEGA32U4_.27 124.13,123.55 v1(124.32,123.36)
TCK: JTAG.1 MEGA32U4_.39 | length 6.6
  Component Side Top w0.254: MEGA32U4_.39 136.338,136.22 JTAG.1@137.509,135.049
TDI: JTAG.9 MEGA32U4_.36 | length 16.3
  Component Side Top w0.254: MEGA32U4_.36 132.36,133.82 134.39,131.79 134.39,128.58 134.94,128.03 v1(139.86,128.03)
  Component Side Bottom w0.254: v2(137.61,130.04) 138.65,130.04 139.86,128.83 v1(139.86,128.03)
TDO: JTAG.3 MEGA32U4_.37 | length 18
  Component Side Top w0.254: MEGA32U4_.37 132.46,134.62 135.29,131.79 135.29,129.65 135.92,129.02 139.41,129.02 139.97,129.58 139.97,132.89 139.12,133.74 JTAG.3@137.998,133.74
TMS: JTAG.5 MEGA32U4_.38 | length 7.8
  Component Side Top w0.254: MEGA32U4_.38 132.74,135.42 135.63,132.53 JTAG.5@137.998,132.53
TXD_SU: MEGA32U4_.21 XB24_SU.4 | length 17.7
  Component Side Top w0.254: v2(116.72,132.24) 117.5,133.02 MEGA32U4_.21
  Component Side Bottom w0.254: XB24_SU.4 114.37,139.51 115.84,138.04 115.84,133.12 v2(116.72,132.24)
VBAT_LEVEL_SU: MEGA32U4_.40 R7.1 R14.2 | length 10.1
  Component Side Top w0.254: MEGA32U4_.40 137.4,137.02 v1(138.94,138.56)
  Component Side Bottom w0.254: R7.1 138.92,138.58 v1(138.94,138.56)
VBAT_SU: C15.2 DS3232.14 PWR.1 SW_1.1 | length 55.6
  Component Side Top w0.5: SW_1.1 141.57,154.7 145.25,154.7 ; PWR.1 145.25,154.7 ; v1(157.14,152.24) 154.68,154.7 145.25,154.7
  Component Side Bottom w0.254: v2(148.17,126.84) 148.17,127.66
  Component Side Bottom w0.5: DS3232.14@148.17,124.41 v2(148.17,126.84) ; 148.17,127.66 150.16,129.65 155.4,129.65 158.03,132.28 158.03,151.34 v1@157.135,152.235
VBUS_DETECT: MEGA32U4_.41 R4.1 R8.2 | length 18.3
  Component Side Top w0.254: MEGA32U4_.41 132.8,137.82 133.48,138.5 133.48,141.97 133.2,142.25 133.2,150.5 v1(132.88,150.82)
  Component Side Bottom w0.254: 132.88,152.12 v1(132.88,150.82) 132.88,152.87 R4.1@132.92,152.91
VBUS_SU: C3.2 MEGA32U4_.7 R4.2 SW_1.3 USB_PWR_ON.1 uUSB_1.1 | length 55.7
  Component Side Top w0.254: v3(122.87,149.79) 122.87,145.24 124.13,143.98 MEGA32U4_.7 ; v1(131.12,154.61) 131.12,155.33
  Component Side Top w0.5: uUSB_1.1 135.08,155.39 SW_1.3
  Component Side Bottom w0.254: v3(122.87,149.79) 122.87,150.95 126.53,154.61 v1(131.12,154.61) 131.12,155.34 132.05,156.27 143,156.27 147.48,151.79 USB_PWR_ON.1 ; R4.2 v1@131.08,154.57
VIN: C8.2 C11.2 INV.5 R7.2 R12.2 R18.1 SW_1.2 TPS63001.5 | length 46.1
  Component Side Top w0.254: R12.2 134.7,151.38 136.145,152.825 140.295,152.825 ; SW_1.2@137.23,155.89 SW_1.2 ; C8.2 145.12,151.5 146.77,149.85 146.77,147.95 ; v1(140.72,140.52) 140.72,140.251 140.989,140.52 141.149,140.52 146.77,146.141 146.77,147.95 ; R18.1@154.59,140.94 C11.2 ; C11.2@154.73,142.255 154.73,142.55 153.82,143.46 151.26,143.46 146.77,147.95
  Component Side Top w0.5: SW_1.2@137.23,155.89 140.295,152.825 140.58,152.54 C8.2 ; C11.2@154.73,142.55 INV.5@154.73,144.43
WAKE_ALARM_SU: C13.1 DS3232.3 DUAL_NCH_2.5 DUAL_NCH_2.6 DUAL_NCH_2.7 DUAL_NCH_2.8 INV.2 MAIN_PWR_EN.1 R18.2 R21.2 | length 35.1
  Component Side Top w0.254: INV.2 v1(153.85,149.14) 154.66,149.95 155.38,149.95 155.96,149.37 155.96,148.25 157.76,146.45 R21.2@157.76,140.21 ; v1@156.76,140.21 R21.2@157.76,140.21 ; R21.2 R21.2@157.76,140.21
  Component Side Bottom w0.254: DS3232.3 148.14,135.66 149.38,136.9 153.94,136.9 156.76,139.72 v1(156.76,140.26) ; MAIN_PWR_EN.1@151.94,152.24 DUAL_NCH_2.5 DUAL_NCH_2.6 DUAL_NCH_2.7 DUAL_NCH_2.8
pads on no net: DS3232.1 FRAM.2 FRAM.3 FRAM.7 INV.1 JTAG.7 JTAG.8 MEGA32U4_.2 MEGA32U4_.8 MEGA32U4_.9 MEGA32U4_.10 MEGA32U4_.11 MEGA32U4_.26 MEGA32U4_.42 SHT35_.3 SHT35_.6 SI7051_.3 SI7051_.4 SW_1.4 SW_1.5 uUSB_1.4 XB24_SU.5 XB24_SU.8 XB24_SU.9 XB24_SU.12 XB24_SU.14 XB24_SU.15 XB24_SU.16 XB24_SU.17 XB24_SU.18 XB24_SU.19 XB24_SU.20 XB24_SU.21 XB24_SU.23 XB24_SU.24 XB24_SU.27 XB24_SU.28 XB24_SU.30 XB24_SU.31 XB24_SU.32 XB24_SU.33 XB24_SU.34 XB24_SU.36 XB24_SU.37
copper on no net:
  other v1: 134.33,158.89 141.63,158.89

## Polygon pours and split planes (outlines as drawn)
GND on Component Side Top "RegGND" (solid, remove dead copper, pour order 0): 137.475,149.287 138.13,149.287 138.13,149.74 139.546,149.74 139.546,149.063 139.824,148.785 140.918,148.785 140.918,148.52 140.908,148.51 139.834,148.507 139.801,148.507 139.546,148.252 139.546,147.44 138.069,147.451 138.069,147.833 137.572,148.009 137.572,148.122 137.572,148.284 137.741,148.284 138.016,148.544 138.016,148.847 137.951,148.912 137.854,149.009 137.475,149.009
VIN on Component Side Top "VinREG" (solid, remove dead copper, pour order 2): 139.99,149.64 139.99,151.96 140.16,152.13 140.17,152.14 141.05,152.14 141.08,152.14 141.24,151.98 141.25,151.97 141.25,149.62
+3V3 on Component Side Top "VoutREG" (solid, remove dead copper, pour order 4): 139.91,147.64 139.91,144.04 140.21,143.74 140.22,143.73 140.95,143.73 140.95,145.93 140.96,145.94 141.27,146.25 141.27,147.68
GND on Component Side Top "VoutGND" (solid, remove dead copper, pour order 6): 141.59,145.97 141.59,143.77 142.17,143.19 143,143.19 143.4,143.59 143.4,145.8 143.02,146.18 141.86,146.18
NetL1_1 on Component Side Top "L1_pin" (solid, remove dead copper, pour order 8): 140.01,149.29 141.243,149.29 141.921,149.968 142.446,150.493 145.096,150.493 145.621,149.968 145.621,149.443 145.621,149.376 145.257,149.012 140.01,149.012
NetL1_2 on Component Side Top "L1_pin_2" (solid, remove dead copper, pour order 10): 140.281,148.292 145.185,148.292 145.626,147.851 145.626,147.326 145.101,146.801 142.451,146.801 141.926,147.326 141.402,147.955 141.239,148.013 140.378,148.013 140.237,148.013 140.195,148.055
GND on Ground Plane (split plane): 159.49,159.49 159.49,100.51 108.47,100.51 108.47,117.68 103.77,117.68 100.51,120.94 100.51,129.36 101.04,129.89 105.63,129.89 105.63,129.87 108.47,129.87 108.47,137.44 108.45,143.61 105.21,143.61 105.21,154.87 108.44,154.87 108.44,159.49
+3V3 on Power Plane (split plane): 159.49,159.49 159.49,100.51 108.48,100.51 108.48,117.66 103.78,117.66 100.51,120.93 100.51,129.33 101.05,129.87 105.64,129.87 108.48,129.87 108.48,137.42 108.46,143.59 105.22,143.59 105.22,154.85 108.45,154.85 108.45,159.49

## Other copper
Ground Plane (plane layer: these items are gaps in the copper):
  pour cut-out: 108.44,160.38 108.44,154.87 105.21,154.87 105.21,143.61 108.45,143.61 108.47,137.44 108.47,129.87 105.63,129.87 105.63,129.89 101.04,129.89 100.24,129.09 100.24,121.21 103.77,117.68 108.47,117.68 108.47,99.13 108.38,99.04 98.47,99.04 98.47,160.38
Power Plane (plane layer: these items are gaps in the copper):
  pour cut-out: 108.45,160.55 108.45,154.85 105.22,154.85 105.22,143.59 108.46,143.59 108.48,137.42 108.48,129.87 105.64,129.87 101.05,129.87 100.25,129.07 100.25,121.19 103.78,117.66 108.48,117.66 108.48,99.11 108.39,99.02 98.48,99.02 98.48,160.55

## Silkscreen, mask and mechanical layers (free items; w line width, h text height)
Top Overlay:
  text "1" at 135.508,134.835 h0.9
  text "10" at 144.388,129.535 h0.9
  text "BACON V2 Temperature & Humidity Sensor Unit." at 102,110 h1 r90
  text "Victoria University & BRANZ 2017" at 104,110 h1 r90

## Text inside footprints (layer, text, board x,y; h text height)
JTAG: Mechanical 1 "J1" at 139.586,132.985 h0.64 r270
PWR: Bottom Overlay "+ -" at 144.805,159.142 h0.9 r180
RESET_SU: Top Overlay "SW" at 109.95,142.285 h1 r270
RTC_RESET: Top Overlay "SW" at 153.51,130.505 h1 r270
WAKE: Top Overlay "SW" at 154.425,137.75 h1 r180